# Altium PCB NUC977 DEV BOARD.PcbDoc (part 2 of 5)
Units mil, origin at the board's own origin, x right, y up, seen from the top; angles counter-clockwise.
Board outline 9012.5 x 7677.17 mil, 4 copper layers (Top, 2-GND, 3-POWER, Bottom), stack 35.4 mil thick; 487 components, 451 nets, 1969 pads, 1529 vias.
Unrouted connection lines stored in the file: 1.
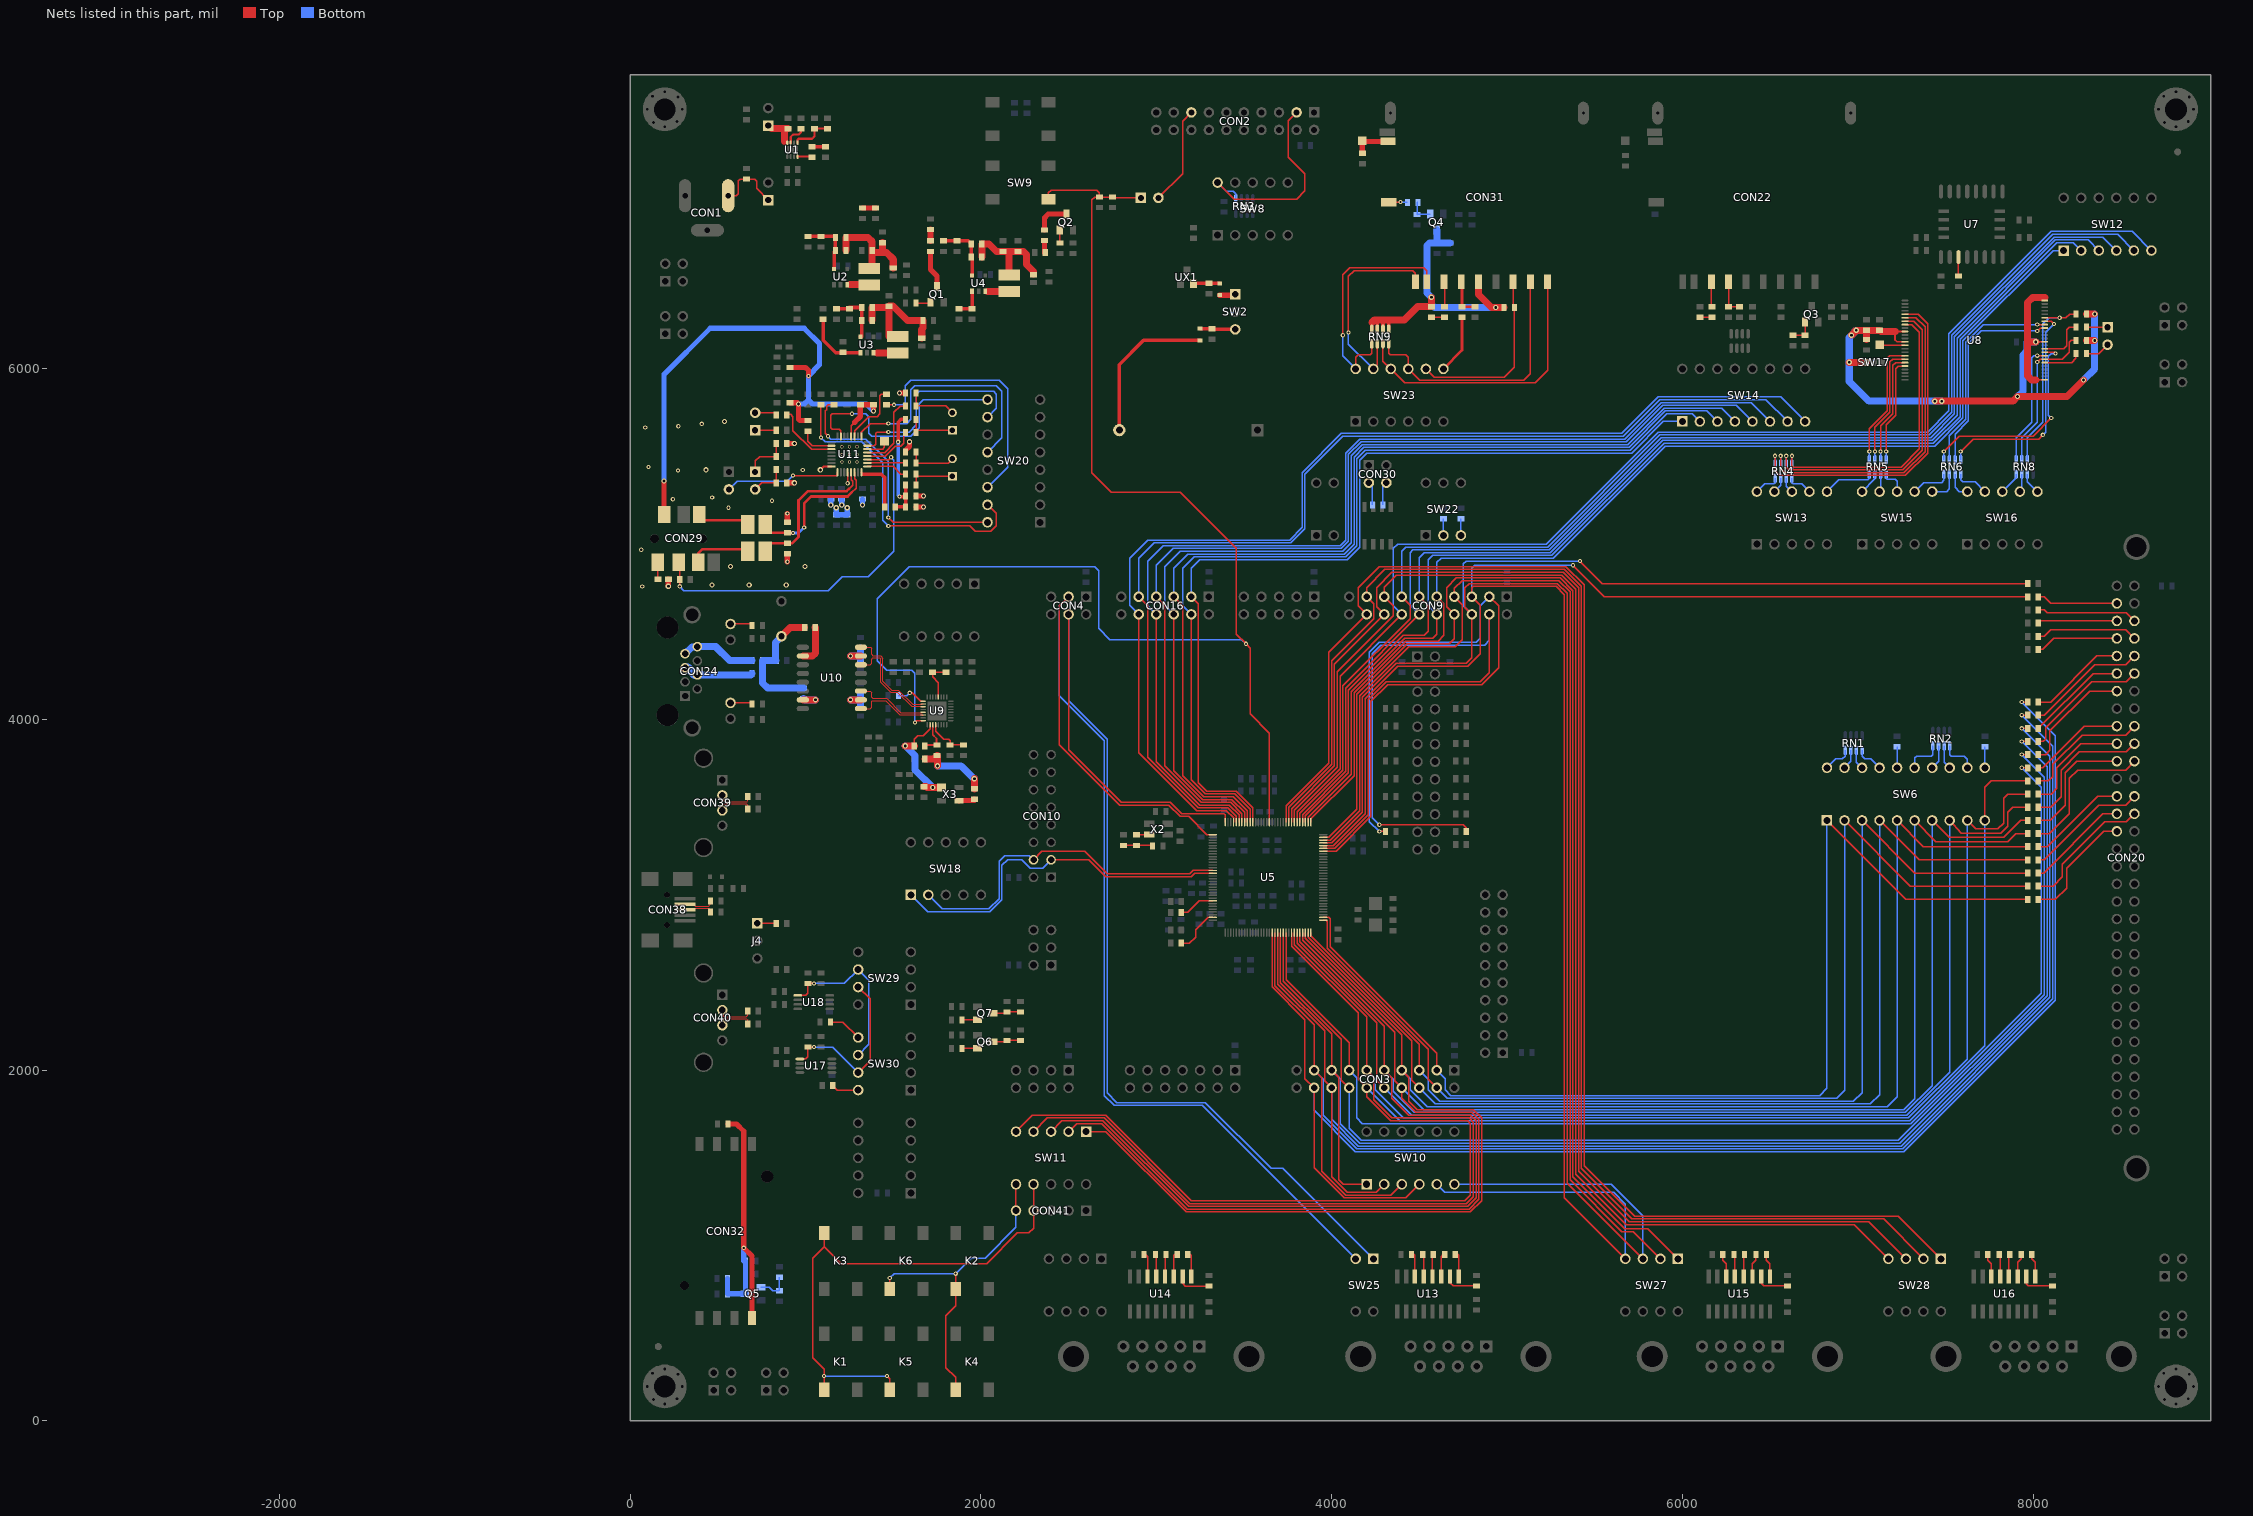
[diagram p4: the nets of this part, all layers, seen from the top]

## Via types
v1: diameter 24, hole 12, Top to Bottom, 897 vias
v2: diameter 30, hole 16, Top to Bottom, 628 vias
v3: diameter 20, hole 10, Top to Bottom, 4 vias

## Nets (pads, with @x,y where several pads share a name; then routed paths per layer and width w, separated by ;. In a path a pad name is that pad's centre, name@x,y a point inside that pad or via, vN(x,y) a via of type N, cw(c..) or ccw(c..) an arc to the next point about the centre after c; other vN are vias at no path point) (continued)
CDAVS: C28.1 CB30.1 CT72.1 CT73.1 CT77.1 L13.1 R75.2 R76.1 R77.1 R83.1 R92.1 R94.1 R125.2 R126.2 U11.24 U11.28 U11.33 U11.34 U11.35 U11.36 U11.37 U11.38 U11.39 U11.40 U11.41 | length 785.8
  Top w8: v1(1240,5348) 1240,5410.14 U11.28@1240.16,5410.14
  Top w12: v2(1084.4,5424) 1104,5443.6 U11.24@1147.64,5443.6
  Top w30: v2(217.5,4760) L13.1@217.5,4800 ; R77.1@892.5,5350 v2(936,5350) ; R76.1@892.5,5575 v2(936,5575) ; v1(896,4900) R125.2@896,4946 ; R126.2@896,5126 v1(896,5175) ; v2(1536,5862.5) R83.1@1570,5862.5 ; R75.2@1570,5525 1570,5536 1592,5558 v2(1592,5584) ; CT72.1@1630,5212.5 v2(1672,5212.5) ; CB30.1@1630,5275 v2(1672,5275)
  Bottom w30: v2(1143.75,5224) CT73.1@1143.75,5257.5 ; v2(1175,5208) R92.1@1175,5167.5 R94.1@1237.5,5167.5 v2(1237.5,5208) ; v2(1206.25,5224) C28.1@1206.25,5257.5 ; v2(1325,5224) CT77.1@1325,5257.5
  other v1: 68.64,4758.8 63.02,4968.26 560,5208 808,5248 242.96,5256.44 467.43,5265.97 272.01,5420 984,5424 104,5440 85.78,5666.01 274.31,5672.9 407.65,5686.7
  other v2: 465.95,4767.11 678.09,4767.11 890.22,4767.11 572.02,4873.18 996.28,4873.18 432,5424 537.5,5700
CDVS: CON29.G CT75.1 CT79.1 R84.1 R87.1 R89.1 U11.12 | length 3292.2
  Top w8: U11.12@1259.84,5614.86 1259.84,5675.34 1280.5,5696
  Top w30: v2(192,5360) 192,5169 CON29.G@192.91,5169 ; CT75.1@912.5,5807.5 952.5,5807.5 v2(960,5800) 960,5713 968,5705 R84.1@1012.5,5705 ; CT79.1@912.5,6007.5 913,6008 1000,6008 1016,5992 v1(1016,5960) ; 1280.5,5696 1312.5,5728 R89.1@1312.5,5795 R87.1@1387.5,5795 v2(1387.5,5760)
  Bottom w30: v2(192,5360) 192,5968.91 456,6232 992,6232 1080,6144 1080,6024 v1(1016,5960) 1016,5824 ; v2(960,5800) 992,5800 1016,5824 ; v2(1387.5,5760) 1347.5,5800 1040,5800 1016,5824
COL: R57.1 R58.2 U9.4 | length 242.3
  Top w8: U9.4@1741.63,3970.76 1741.63,3933.37 1787,3888 1816,3888 1824,3880 1824,3856 R57.1@1825,3855 R58.2@1900,3855
COL0: CON41.4 K1.1 K3.2 K5.1 SW11.7 | length 2962.1
  Top w8: K1.1@1105.32,177.66 v1(1105.32,256) 1105.32,294.68 1040,360 1040,928 1105.32,993.32 ; K3.2@1105.32,1072.34 1105.32,993.32 ; v1(1464,256) 1480,240 1480,177.97 K5.1@1480.32,177.66 ; SW11.7@2300,1350 CON41.4@2300,1200 2300,1100 2272,1072 2208,1072 2032,896 1202.63,896 1105.32,993.32
  Bottom w8: v1(1105.32,256) v1(1464,256)
COL1: CON41.5 K2.1 K4.1 K6.1 SW11.6 | length 1857.3
  Top w8: K6.1@1480.32,752.66 v1(1480.32,816) ; K4.1@1855.32,177.66 1856,178.34 1856,248 1800,304 1800,600.68 1855.32,656 K2.1@1855.32,752.66 1856,753.34 v1(1856,840) ; CON41.5@2200,1200 SW11.6@2200,1350
  Bottom w8: v1(1480.32,816) 1504.32,840 v1(1856,840) 1944,928 2024,928 2200,1104 CON41.5@2200,1200
CRS: R59.1 R60.2 U9.20 | length 230.2
  Top w8: U9.20@1757.37,4128.24 1757.37,4210.63 1725,4243 R59.1@1725,4270 R60.2@1800,4270
CSB: SW20.9 U11.15 | length 1341
  Top w8: U11.15@1200.79,5614.86 1200.79,5647.21 1192,5656 1152,5656 1144,5664 1144,5736 1152,5744 v1(1264,5744)
  Bottom w8: v1(1264,5744) 1344,5744 1360,5728 1360,5632 1376,5616 1600,5616 1648,5664 1648,5801 1672,5825 SW20.9@2037.5,5825
DAC0: C63.1 R126.1 U11.30 | length 843.9
  Top w8: 1264,5296.47 1288,5320.47 1288,5364 1279.53,5372.47 U11.30@1279.53,5410.14
  Top w15: C63.1@770,5112 770,5066 R126.1@896,5066 898,5064 v1(928,5064) ; v1(992,5096) 992,5232 1032,5272 1239.53,5272 1264,5296.47
  Bottom w15: v1(928,5064) 960,5064 v1(992,5096)
DAC1: C62.1 R125.1 U11.29 | length 880.5
  Top w8: 1248,5316.16 1267.84,5336 1267.84,5360.16 1259.84,5368.16 U11.29@1259.84,5410.14
  Top w15: C62.1@770,4960 770,5006 R125.1@896,5006 925,5006 960,5041 960,5250.16 1012.5,5302.66 1234.5,5302.66 1248,5316.16
DACI: SW20.12 U11.9 | length 1427.8
  Top w8: U11.9@1318.9,5614.86 1318.9,5638.9 1368,5688 v1(1472,5688)
  Bottom w8: v1(1472,5688) 1576,5688 1600,5712 1600,5880 1624,5904 2088,5904 2120,5872 2120,5607.5 SW20.12@2037.5,5525
EMCLK: R103.2 SW23.7 | length 339
  Top w15: SW23.7@4637.5,6000 4743.75,6106.25 R103.2@4743.75,6295
EMCMD: CON31.2 R101.1 SW23.8 | length 1038
  Top w8: SW23.8@4537.5,6000 4585.5,5952 4984,5952 5042.5,6010.5 R101.1@5042.5,6350 5034.74,6357.76 CON31.2@5034.74,6496.16
EMD0: CON31.7 RN9.2 SW23.12 | length 1353.4
  Top w8: v1(4064,6192) 4064,6536 4104,6576 4526.62,6576 4542.62,6560 CON31.7@4542.62,6496.16 ; SW23.12@4137.5,6000 4137.5,6065.5 4152,6080 4221,6080 4229,6088 RN9.2@4229,6143
  Bottom w8: v1(4064,6192) 4064,6073.5 SW23.12@4137.5,6000
EMD1: CON31.8 RN9.4 SW23.11 | length 1190.1
  Top w8: v1(4096,6208) 4096,6528 4128,6560 4464,6560 4477.66,6546.34 CON31.8@4477.66,6496.16 ; SW23.11@4237.5,6000 4261,6023.5 RN9.4@4261,6143
  Bottom w8: v1(4096,6208) 4096,6141.5 SW23.11@4237.5,6000
EMD2: CON31.9 RN9.6 SW23.10 | length 1622.9
  Top w8: RN9.6@4293,6143 4293,6044.5 SW23.10@4337.5,6000 4417.5,5920 5160,5920 5231.59,5991.59 CON31.9@5231.59,6496.16
EMD3: CON31.1 RN9.8 SW23.9 | length 1503.5
  Top w8: RN9.8@4325,6143 4325,6088 4333,6080 4424,6080 4437.5,6066.5 SW23.9@4437.5,6000 4501.5,5936 5096,5936 5133.17,5973.17 CON31.1@5133.17,6496.16
EMVD33: CON31.4 CT80.2 Q4.D R97.2 R101.2 R102.1 RN9.1 RN9.3 RN9.5 RN9.7 | length 1814.2
  Top w20: RN9.1@4229,6225 4229,6264 ; RN9.3@4261,6225 4261,6280 ; RN9.5@4293,6225 4293,6280 ; RN9.7@4325,6225 4325,6280
  Top w40: 4229,6264 4245,6280 4261,6280 4293,6280 4325,6280 4416,6280 4491,6355 R102.1@4568.75,6355 v2(4568.75,6408) ; CON31.4@4837.89,6496.16 4837.89,6424.61 4912.5,6350 v2(4936,6350) R101.2@4982.5,6350
  Bottom w40: Q4.D@4600,6792.22 CT80.2@4600,6717.5 ; R97.2@4675,6717.5 CT80.2@4600,6717.5 ; v2(4936,6350) 4586,6350 4568.75,6367.25 v2(4568.75,6408) 4544,6432.75 4544,6704 4557.5,6717.5 CT80.2@4600,6717.5
EMWP: CON31.11 PAD3.\ R124.1 | length 218
  Top w30: R124.1@4175,7230 PAD3.\@4175,7300 4177.66,7297.34 CON31.11@4321.95,7297.34
ETHX0: R65.1 R66.1 U9.3 | length 196.9
  Top w8: R65.1@1680,3850 1682,3850 R65.1@1687,3855 ; 1725.88,3912.5 U9.3@1725.88,3970.76 ; R66.1@1746.53,3856.34 1747.88,3855 R66.1@1750,3855
  Top w10: R65.1@1687,3855 R66.1@1747.88,3855 ; 1725.88,3912.5 1746.53,3891.84 R66.1@1746.53,3856.34
ETHX1: C23.1 R65.2 U9.2 X3.1 | length 633.4
  Top w8: R65.2@1620,3850 1620,3888 1639.81,3907.81 1670.31,3907.81 1710.13,3947.63 U9.2@1710.13,3970.76
  Top w40: v2(1568,3850) R65.2@1620,3850 ; C23.1@1674.5,3617 1687.5,3617 1692,3612.5 v2(1725,3612.5) X3.1@1775,3612.5
  Bottom w40: v2(1568,3850) 1569,3850 1625,3794 1625,3712.5 v2(1725,3612.5)
FS: SW20.10 U11.7 | length 1162.3
  Top w8: U11.7@1352.36,5561.71 1392,5561.71 1400,5569.71 1400,5632 1408,5640 v1(1472,5640)
  Bottom w8: v1(1472,5640) 1592,5640 1632,5680 1632,5856 1648,5872 2072,5872 2088,5856 2088,5775.5 SW20.10@2037.5,5725
ICENRST: CON2.15 J3.2 | length 565.2
  Top w8: J3.2@3012.5,6975 3150,7112.5 3150,7412.5 CON2.15@3200,7462.5
LAUXI: C33.2 U11.19 | length 385.9
  Top w8: C33.2@892.5,5737.5 896,5741 915,5741 928,5728 928,5648 1033.97,5542.03 U11.19@1147.64,5542.03
LCLK: CON20.8 RL19.2 | length 583.9
  Top w10: RL19.2@8030,4475 8064,4475 8101,4512 8528.75,4512 CON20.8@8578.15,4462.6
LCS: CON20.3 RL17.2 | length 463.6
  Top w8: RL17.2@8030,4700 8064,4700 8101.4,4662.6 CON20.3@8478.15,4662.6
LD0: CON20.29 RL1.2 | length 674.9
  Top w8: RL1.2@8030,2975 8128,2975 8192,3039 8192,3152 8402.6,3362.6 CON20.29@8478.15,3362.6
LD1: CON20.28 RL2.2 | length 761.2
  Top w8: RL2.2@8030,3050 8114,3050 8168,3104 8168,3176 8408,3416 8531.55,3416 CON20.28@8578.15,3462.6
LD2: CON20.27 RL3.2 | length 588
  Top w8: RL3.2@8030,3125 8061,3125 8398.6,3462.6 CON20.27@8478.15,3462.6
LD3: CON20.26 RL4.2 | length 698.3
  Top w8: RL4.2@8030,3200 8064,3200 8376,3512 8527.55,3512 CON20.26@8578.15,3562.6
LD4: CON20.25 RL5.2 | length 567.2
  Top w8: RL5.2@8030,3275 8080,3275 8368,3562.6 CON20.25@8478.15,3562.6
LD5: CON20.22 RL6.2 | length 836.2
  Top w8: RL6.2@8030,3350 8094,3350 8208,3464 8208,3664 8256,3712 8527.55,3712 CON20.22@8578.15,3762.6
LD6: CON20.21 RL7.2 | length 695.8
  Top w8: RL7.2@8030,3425 8097,3425 8184,3512 8184,3696 8250.6,3762.6 CON20.21@8478.15,3762.6
LD7: CON20.20 RL8.2 | length 787.4
  Top w8: RL8.2@8030,3500 8100,3500 8160,3560 8160,3712 8264,3816 8531.55,3816 CON20.20@8578.15,3862.6
LD8: CON20.19 RL9.2 | length 636.8
  Top w8: RL9.2@8030,3575 8103,3575 8136,3608 8136,3726.6 8272,3862.6 CON20.19@8478.15,3862.6
LD9: CON20.18 RL10.2 | length 718.6
  Top w8: RL10.2@8030,3650 8088,3650 8112,3674 8112,3744 8280,3912 8527.55,3912 CON20.18@8578.15,3962.6
LD10: CON20.17 RL11.2 | length 546.6
  Top w8: RL11.2@8030,3725 8056,3725 8293.6,3962.6 CON20.17@8478.15,3962.6
LD11: CON20.13 RL12.2 | length 664
  Top w8: RL12.2@8030,3800 8072,3800 8096,3824 8096,3936 8322.6,4162.6 CON20.13@8478.15,4162.6
LD12: CON20.12 RL13.2 | length 746.2
  Top w8: RL13.2@8030,3875 8059,3875 8072,3888 8072,3952 8336,4216 8531.55,4216 CON20.12@8578.15,4262.6
LD13: CON20.11 RL14.2 | length 577.6
  Top w8: RL14.2@8030,3950 8342.6,4262.6 CON20.11@8478.15,4262.6
LD14: CON20.10 RL15.2 | length 687.8
  Top w8: RL15.2@8030,4025 8064.75,4025 8352.75,4312.5 8528.05,4312.5 CON20.10@8578.15,4362.6
LD15: CON20.9 RL16.2 | length 556.9
  Top w8: RL16.2@8030,4100 8100,4100 8362.6,4362.6 CON20.9@8478.15,4362.6
LDEN: CON20.5 RL22.2 | length 460.8
  Top w8: RL22.2@8030,4550 8030,4562.6 CON20.5@8478.15,4562.6
LHSYNC: CON20.7 RL20.2 | length 474.1
  Top w8: RL20.2@8030,4400 8056,4400 8118.6,4462.6 CON20.7@8478.15,4462.6
LIN0: CON29.B R91.1 U11.3 | length 2148.3
  Top w8: CON29.B@275.59,4897.34 282.5,4890.43 R91.1@282.5,4800 v1(282.5,4760) ; U11.3@1352.36,5482.97 1475.35,5482.97 1488,5495.62 v1(1488,5496)
  Bottom w8: v1(282.5,4760) 306.5,4736 1130.5,4736 1209.34,4814.84 1358.84,4814.84 1504,4960 1504,5480 v1(1488,5496)
LIN1: PAD4.\ U11.6 | length 137.2
  Top w8: U11.6@1352.36,5542.03 1440,5542.03 1450,5552.03 PAD4.\@1450,5587.5
LSPKOUT: CON25.2 U11.25 | length 666.7
  Top w8: v1(928,5391.89) 1175.89,5391.89 1181.1,5397.1 U11.25@1181.1,5410.14
  Bottom w8: CON25.2@562.5,5312.5 610,5360 896.11,5360 v1(928,5391.89)
LVSYNC: CON20.6 RL21.2 | length 574
  Top w8: RL21.2@8030,4625 8064,4625 8081,4608 8532.75,4608 CON20.6@8578.15,4562.6
MCLK: R82.1 U11.11 | length 361.9
  Top w8: U11.11@1279.53,5614.86 1279.53,5647.53 1360,5728 1408,5728 1424,5744 1424,5847 1432,5855 R82.1@1462.5,5855
MDI_RN: U9.26 U10.8 | length 590.2
  Top w4: U10.8@1315.5,4412.5 1371.5,4412.5 1376,4408 1376,4371.51 1384,4363.51 1428.2,4363.51 1441.2,4350.51 1441.2,4217.46 1490.51,4168.15 1528.82,4168.15 1609.97,4087 1662.13,4087 1664,4088.87 U9.26@1670.76,4088.87
MDI_RP: U9.27 U10.6 | length 578.7
  Top w4: U10.6@1315.5,4312.5 1368.5,4312.5 1376,4320 1376,4344 1383.51,4351.51 1423.23,4351.51 1429.2,4345.54 1429.2,4212.48 1485.54,4156.15 1523.85,4156.15 1605,4075 1662.13,4075 1664,4073.12 U9.27@1670.76,4073.12
MDI_TN: U9.29 U10.3 | length 422.4
  Top w4: U10.3@1315.5,4162.5 1368,4162.5 1376,4154.5 1376,4128 1383.53,4120.47 1462.72,4120.47 1543.44,4039.75 1664,4039.75 1665.87,4041.63 U9.29@1670.76,4041.63
MDI_TP: U9.30 U10.1 | length 428.1
  Top w4: U10.1@1315.5,4062.5 1368,4062.5 1376,4070.5 1376,4104 1380.47,4108.47 1457.75,4108.47 1538.47,4027.75 1664,4027.75 1665.87,4025.88 U9.30@1670.76,4025.88
MIC00: C29.1 U11.2 | length 218
  Top w8: U11.2@1352.36,5463.29 1569.21,5463.29 C29.1@1570,5462.5
MIC01: C32.1 U11.1 | length 235.7
  Top w8: U11.1@1352.36,5443.6 1500.4,5443.6 1544,5400 C32.1@1570,5400
MIC10: C35.1 U11.5 | length 430.6
  Top w8: U11.5@1352.36,5522.34 1450.34,5522.34 1504,5576 1504,5752 1539.5,5787.5 C35.1@1570,5787.5
MIC11: C34.1 U11.4 | length 309.5
  Top w8: U11.4@1352.36,5502.66 1454.66,5502.66 1512,5560 1544,5560 1560,5576 1560,5637.5 C34.1@1570,5637.5
MICBIAS: CB30.2 CT72.2 R74.2 R78.2 R79.2 | length 694.9
  Top w20: R74.2@1511.25,5212.5 CT72.2@1570,5212.5 CB30.2@1570,5269.67 ; v1(1528,5584) 1528,5696 1544.5,5712.5 R79.2@1570,5712.5 ; v1(1536,5272) 1567.67,5272 CB30.2@1570,5269.67 ; R78.2@1570,5337.5 CB30.2@1570,5275 CB30.2@1570,5269.67
  Bottom w20: v1(1528,5584) 1528,5280 v1(1536,5272)
MODE: R84.2 U11.18 | length 203.3
  Top w8: R84.2@1012.5,5645 1012.5,5587.5 1038.29,5561.71 U11.18@1147.64,5561.71
N02492: C50.1 U14.5 | length 127.1
  Top w8: C50.1@2995,950 3000,945 U14.5@3000,825
N02496: C49.1 U14.3 | length 143.1
  Top w8: U14.3@3100,825 3100,944 3108,952 3118,952 C49.1@3120,950
N02500: C49.2 U14.1 | length 143.1
  Top w8: C49.2@3180,950 3182,952 3192,952 3200,944 U14.1@3200,825
N02504: C50.2 U14.4 | length 127.1
  Top w8: U14.4@3050,825 3050,945 C50.2@3055,950
N02534: C47.1 U14.2 | length 198.5
  Top w8: U14.2@3150,825 3150,784 3166,768 3298,768 C47.1@3300,770
N02546: C51.2 U14.6 | length 136.8
  Top w8: C51.2@2930,950 2936,950 2950,936 U14.6@2950,825
N02580: C55.1 U15.5 | length 130
  Top w8: C55.1@6295,950 6300,950 U15.5@6300,825
N02584: C54.1 U15.3 | length 133.3
  Top w8: U15.3@6400,825 6400,896 6420,916 C54.1@6420,950
N02588: C54.2 U15.1 | length 133.3
  Top w8: C54.2@6480,950 6480,916 6500,896 U15.1@6500,825
N02592: C55.2 U15.4 | length 130
  Top w8: U15.4@6350,825 6350,950 C55.2@6355,950
N02616: C52.1 U15.2 | length 196.8
  Top w8: U15.2@6450,825 6450,784 6464,770 C52.1@6600,770
N02708: C56.2 U15.6 | length 133.3
  Top w8: C56.2@6230,950 6230,916 6250,896 U15.6@6250,825
N03132: C60.1 U16.5 | length 130
  Top w8: C60.1@7807.5,950 7812.5,950 U16.5@7812.5,825
N03136: C59.1 U16.3 | length 133.3
  Top w8: U16.3@7912.5,825 7912.5,904 7932.5,924 C59.1@7932.5,950
N03140: C59.2 U16.1 | length 133.3
  Top w8: C59.2@7992.5,950 7992.5,924 8012.5,904 U16.1@8012.5,825
N03144: C60.2 U16.4 | length 127.1
  Top w8: U16.4@7862.5,825 7862.5,945 C60.2@7867.5,950
N03174: C57.1 U16.2 | length 198.3
  Top w8: U16.2@7962.5,825 7962.5,781.5 7974,770 C57.1@8112.5,770
N03186: C61.2 U16.6 | length 133.3
  Top w8: C61.2@7742.5,950 7742.5,916 7762.5,896 U16.6@7762.5,825
N03932: C45.1 U13.5 | length 130
  Top w8: C45.1@4520,950 4525,950 U13.5@4525,825
N03936: C44.1 U13.3 | length 137.4
  Top w8: U13.3@4625,825 4625,937 4638,950 C44.1@4645,950
N03940: C44.2 U13.1 | length 141.5
  Top w8: C44.2@4705,950 4719,950 4725,944 U13.1@4725,825
N03944: C45.2 U13.4 | length 127.1
  Top w8: U13.4@4575,825 4575,945 C45.2@4580,950
N03976: C42.1 U13.2 | length 193.9
  Top w8: U13.2@4675,825 4675,789 4694,770 C42.1@4825,770
N03988: C46.2 U13.6 | length 141.5
  Top w8: C46.2@4455,950 4469,950 4475,944 U13.6@4475,825
N16062858: R130.1 SW29.6 SW30.6 U18.5 | length 975.8
  Top w8: U18.5@955.26,2426.77 1000,2426.77 1012.5,2439.27 R130.1@1012.5,2495 v1(1048,2495)
  Bottom w8: v1(1048,2495) 1220.5,2495 SW29.6@1300,2574.5 1360,2514.5 1360,2147 SW30.6@1300,2087
N16062862: R129.1 SW29.7 SW30.7 U17.5 | length 997.2
  Top w8: U17.5@967.76,2064.27 1000,2064.27 1012.5,2076.77 R129.1@1012.5,2132.5 v1(1048,2132.5) ; SW30.7@1300,1987 1368,2055 1368,2406.5 SW29.7@1300,2474.5
  Bottom w8: v1(1048,2132.5) 1154.5,2132.5 SW30.7@1300,1987
N16063306: LED9.1 Q6.E | length 87.3
  Top w8: LED9.1@1892.5,2125 1892.6,2125.1 Q6.E@1979.72,2125.1
N16063352: LED7.1 Q6.C R115.1 | length 162.2
  Top w8: Q6.C@2070.28,2162.5 2150,2162.5 LED7.1@2150,2170 R115.1@2225,2170
N16063546: LED10.1 Q7.E | length 87.3
  Top w8: LED10.1@1892.5,2287.5 1892.5,2287.6 Q7.E@1979.72,2287.6
N16063582: LED8.1 Q7.C R117.1 | length 157.8
  Top w8: Q7.C@2070.28,2325 2142.5,2325 LED8.1@2150,2332.5 R117.1@2225,2332.5
N16063690: R112.2 SW30.8 | length 155.6
  Top w8: R112.2@1155,1912.5 1180.5,1887 SW30.8@1300,1887
N16063694: R114.2 SW30.5 | length 194
  Top w8: R114.2@1142.5,2275 1212,2275 SW30.5@1300,2187
N16071573: CB1.1 J2.1 U1.8 | length 212
  Top w8: 880,7296 886.63,7289.37 U1.8@895.47,7289.37
  Top w40: J2.1@787.5,7387.5 805,7370 CB1.1@880,7370 ; 880,7296 CB1.1@880,7370 ; CB1.1@900,7370 CB1.1@880,7370
N16071783: R14.1 X2.3 | length 73.7
  Top w8: R14.1@2887.5,3342.5 2889.49,3344.49 X2.3@2960.33,3344.49
N16071803: C5.1 R13.2 R14.2 | length 166.5
  Top w8: C5.1@2812.5,3282.5 R14.2@2887.5,3282.5 2975.5,3282.5 R13.2@2978,3280
N16071977: C1.1 CON1.1 J1.1 | length 384.8
  Top w8: CON1.1@558.56,6987.5 603.5,6987.5 616,7000 616,7072 626.5,7082.5 C1.1@662.5,7082.5 709.5,7082.5 721,7071 721,7029 J1.1@787.5,6962.5
N16072061: LED1.2 U1.4 | length 84.3
  Top w12: U1.4@954.53,7210.63 1034.37,7210.63 LED1.2@1037.5,7207.5
N16072077: R1.2 U1.7 | length 124.2
  Top w12: U1.7@915.16,7289.37 915.16,7323.16 928,7336 960,7336 975,7351 R1.2@975,7370
N16072151: R3.2 R5.1 U1.5 | length 240.3
  Top w12: U1.5@954.53,7289.37 954.53,7306.53 960.5,7312.5 1037.5,7312.5 1050,7325 R3.2@1050,7370 R5.1@1125,7370
N16073800: R25.1 U5.127 | length 264.2
  Top w8: R25.1@3142.5,2725 3189,2725 3224,2760 3224,2800 3295.65,2871.65 U5.127@3322.54,2871.65
N16073966: R24.1 U5.121 | length 207.4
  Top w8: R24.1@3142.5,2900 3180,2900 3246.14,2966.14 U5.121@3322.54,2966.14
N16075968: C6.2 CT7.1 CT8.1 L1.2 R15.2 SW1.1 | length 646.2
  Top w40: R15.2@1230,6675 C6.2@1230,6750 1355,6750 1380,6725 CT7.1@1380,6675 CT7.1@1380,6663.84 ; L1.2@1362.5,6572.24 1365.26,6575 1380,6575 CT7.1@1380,6663.84 ; CT8.1@1437.5,6720 1437.5,6663.84 ; SW1.1@1500,6575 1500,6625 1461.16,6663.84 1437.5,6663.84 ; CT7.1@1380,6663.84 1437.5,6663.84
N16075996: C9.2 C11.1 R18.1 R19.2 U3.5 | length 327.4
  Top w20: C11.1@1175,6342.5 R19.2@1250,6342.5 1250,6350 C9.2@1320,6350 R18.1@1320,6275 1320,6182.53 U3.5@1312.6,6182.53
N16076048: C6.1 C8.2 R15.1 R16.2 U2.5 | length 342.6
  Top w20: R16.2@1012.5,6755 C8.2@1087.5,6755 1165,6755 C6.1@1170,6750 R15.1@1170,6675 1162.6,6667.6 U2.5@1162.6,6570.03
N16076130: L1.1 U2.3 | length 126
  Top w8: U2.3@1237.4,6479.97 1254,6479.97
  Top w40: 1254,6479.97 1360.29,6479.97 L1.1@1362.5,6477.76
N16076160: C9.1 CT10.1 CT12.1 L2.2 R18.2 SW3.1 | length 725
  Top w40: R18.2@1380,6275 C9.1@1380,6350 CT10.1@1475,6350 ; L2.2@1525,6184.74 1475,6184.74 CT10.1@1475,6350 ; SW3.1@1662.5,6175 1662.5,6224.5 1670,6232 CT12.1@1670,6275 1581,6275 1498.5,6357.5 CT10.1@1475,6357.5 CT10.1@1475,6350
N16076656: BT1.2 D2.1 | length 891.7
  Top w20: BT1.2@2789.3,5650.5 2789.3,6024.3 2927.5,6162.5 D2.1@3250,6162.5
N16076674: C14.2 C15.1 R22.1 R23.2 U4.5 | length 346.8
  Top w20: C15.1@1787.5,6730 R23.2@1862.5,6730 1927.5,6730 C14.2@1945,6712.5 R22.1@1945,6637.5 1950.1,6632.4 U4.5@1950.1,6532.53
N16076678: C13.1 R21.2 U4.1 | length 175
  Top w20: R21.2@1875,6342.5 C13.1@1950,6342.5 1950.1,6342.6 U4.1@1950.1,6442.47
N16076738: C14.1 CT14.1 CT16.1 L3.2 R22.2 SW4.1 | length 622.4
  Top w30: SW4.1@2300,6537.5 2300,6556
  Top w40: R22.2@2005,6637.5 C14.1@2005,6712.5 2045.5,6712.5 2088,6670 CT14.1@2125,6670 2160,6670 ; L3.2@2162.5,6534.74 2160,6537.24 2160,6670 ; 2300,6556 2260,6596 2260,6652 2242,6670 CT16.1@2212.5,6670 2160,6670
N16076802: CB2.1 D2.2 SW2.3 | length 204.5
  Top w20: D2.2@3250,6229.5 CB2.1@3317,6229.5 3317,6225 SW2.3@3450,6225
N16077186: C10.1 R17.1 U3.1 | length 373.5
  Top w20: R17.1@1100,6282.5 1100,6164 1171.53,6092.47 C10.1@1225.03,6092.47 ; C10.1@1212.5,6095 C10.1@1225.03,6092.47 ; U3.1@1312.6,6092.47 C10.1@1225.03,6092.47
N16077540: L2.1 U3.3 | length 138.5
  Top w8: U3.3@1387.4,6092.47 1406,6092.47 1408.21,6090.26
  Top w40: 1408.21,6090.26 L2.1@1525,6090.26
N16077552: L3.1 U4.3 | length 138.5
  Top w8: U4.3@2024.9,6442.47 2038,6442.47
  Top w40: 2038,6442.47 2040.21,6440.26 L3.1@2162.5,6440.26
N16088274: Q3.G R43.1 R44.2 | length 143.6
  Top w8: R43.1@6631.25,6192.5 R44.2@6700,6192.5 6700,6267.22 Q3.G@6700.1,6267.22
N16088560: RN5.1 SW13.6 | length 297
  Bottom w8: SW13.6@6825,5300 6893,5368 7058.5,5368 7066.5,5376 RN5.1@7066.5,5400
N16088582: RN6.3 SW15.6 | length 189.4
  Bottom w8: SW15.6@7425,5300 7508,5300 7523.5,5315.5 RN6.3@7523.5,5400
N16088594: RN6.1 SW15.7 | length 229.3
  Bottom w8: SW15.7@7325,5300 7377,5352 7480,5352 7491.5,5363.5 RN6.1@7491.5,5400
N16088636: RN8.1 SW16.8 | length 132.7
  Bottom w8: SW16.8@7825,5300 7904,5379 RN8.1@7904,5400
N16089230: RN4.1 SW13.10 | length 148.5
  Bottom w8: SW13.10@6425,5300 6469,5344 6521,5344 6529,5352 RN4.1@6529,5375
N16089234: RN4.3 SW13.9 | length 89.9
  Bottom w8: SW13.9@6525,5300 6561,5336 RN4.3@6561,5375
N16089238: RN4.5 SW13.8 | length 88.3
  Bottom w8: RN4.5@6593,5375 6593,5332 SW13.8@6625,5300
N16089246: RN4.7 SW13.7 | length 144.5
  Bottom w8: RN4.7@6625,5375 6625,5352 6633,5344 6681,5344 SW13.7@6725,5300
N16089266: C17.1 CON22.5 R52.1 | length 203.7
  Top w8: R52.1@6262.5,6355 R52.1@6264.47,6355 ; CON22.5@6264.47,6496.16 R52.1@6264.47,6355 ; C17.1@6325,6355 R52.1@6264.47,6355
N16089318: RN5.3 SW15.10 | length 130.4
  Bottom w8: SW15.10@7025,5300 7098.5,5373.5 RN5.3@7098.5,5400
N16089326: RN5.5 SW15.9 | length 102.3
  Bottom w8: SW15.9@7125,5300 7130.5,5305.5 RN5.5@7130.5,5400
N16089330: RN5.7 SW15.8 | length 152.5
  Bottom w8: RN5.7@7162.5,5400 7162.5,5376 7168,5370.5 7213.5,5370.5 7225,5359 SW15.8@7225,5300
N16089414: RN6.5 SW16.10 | length 155.1
  Bottom w8: RN6.5@7555.5,5400 7555.5,5324.5 7580,5300 SW16.10@7625,5300
N16089418: RN6.7 SW16.9 | length 197.7
  Bottom w8: RN6.7@7587.5,5400 7587.5,5368 7600,5355.5 7669.5,5355.5 SW16.9@7725,5300
N16089662: RN8.3 SW16.7 | length 104.6
  Bottom w8: SW16.7@7925,5300 7936,5311 RN8.3@7936,5400
N16089708: CON22.6 LED5.2 | length 142.3
  Top w8: CON22.6@6166.04,6496.16 6166.04,6357.71 LED5.2@6168.75,6355
N16089718: RN8.5 SW16.6 | length 123.6
  Bottom w8: RN8.5@7968,5400 7968,5357 SW16.6@8025,5300
N16090054: CON23.1 R47.1 | length 120
  Top w8: R47.1@8305,6237.5 CON23.1@8425,6237.5
N16090066: CON23.2 R48.1 | length 140.7
  Top w8: R48.1@8305,6087.5 8375,6087.5 CON23.2@8425,6137.5
N16091004: LED5.1 R51.2 | length 68.8
  Top w8: R51.2@6100,6295 LED5.1@6168.75,6295
N16113780: R41.2 U7.3 | length 107.5
  Top w8: R41.2@7575,6530 U7.3@7575,6637.5
N16116600: CON39.2 R134.1 | length 202.3
  Top w5: CON39.2@525,3568.31 525,3543.5 536,3532.5 666.5,3532.5 670,3536 R134.1@670,3562.5
N16116644: CON39.3 R135.1 | length 202.4
  Top w5: CON39.3@525,3481.69 525,3509.5 536,3520.5 661.5,3520.5 670,3512 R135.1@670,3490.5
N16117426: CON40.2 R132.1 | length 203
  Top w5: CON40.2@525,2343.31 525,2317 536,2306 662.5,2306 669,2312.5 669,2336.5 R132.1@670,2337.5
N16117430: CON40.3 R133.1 | length 203
  Top w5: CON40.3@525,2256.69 525,2283 536,2294 662.5,2294 669,2287.5 669,2263.5 R133.1@670,2262.5
N16118016: CON38.2 R127.1 | length 172.7
  Top w5: CON38.2@312.2,2946.3 360,2946.3 369.75,2936.55 448,2936.55 457.5,2946.05 R127.1@457.5,2965.5
N16118208: CON38.3 R128.1 | length 166.8
  Top w5: CON38.3@312.2,2914.8 360,2914.8 369.75,2924.55 448,2924.55 457.5,2915.05 R128.1@457.5,2901.5
N16118543: J4.1 R131.1 | length 107.5
  Top w8: J4.1@725,2837.5 R131.1@832.5,2837.5
N16139982: PAD1.\ U8.38 | length 146.2
  Top w8: PAD1.\@7125,6137.5 7128.15,6134.35 U8.38@7269.88,6134.35
N16143119: CX1.1 D1.1 UX1.2 | length 150.3
  Top w20: UX1.2@3213,6487.5 3214,6488.5 CX1.1@3300.5,6488.5 3361.5,6488.5 D1.1@3362.5,6487.5
N16151191: D1.2 SW2.1 | length 92.5
  Top w30: D1.2@3362.5,6420.5 3367,6420 3450,6420 SW2.1@3450,6425
N16774332: C34.2 M2.1 R79.1 | length 282.5
  Top w8: C34.2@1630,5637.5 C34.2@1630,5650 ; R79.1@1630,5712.5 C34.2@1630,5650 ; M2.1@1837.5,5650 C34.2@1630,5650
N16774348: C35.2 M2.2 R83.2 | length 299.3
  Top w8: R83.2@1630,5862.5 C35.2@1630,5787.5 1631.5,5789 1798.5,5789 M2.2@1837.5,5750
N16774352: C29.2 M1.2 R75.1 | length 280.4
  Top w8: R75.1@1630,5525 C29.2@1630,5462.5 1812.5,5462.5 M1.2@1837.5,5487.5
N16774372: C63.2 CON29.D | length 368.2
  Top w15: CON29.D@393.7,5169 375,5150.29 375,5137.5 664,5137.5 670,5143.5 C63.2@670,5112
N16774666: CON29.A L13.2 | length 97.3
  Top w8: L13.2@157.5,4800 CON29.A@157.48,4897.34
N16774778: C62.2 CON29.C | length 353.8
  Top w15: CON29.C@387.8,4897.34 387.8,4946.8 412.8,4971.8 670,4971.8 C62.2@670,4960
N16775704: C30.1 CON27.1 | length 120
  Top w8: CON27.1@712.5,5650 C30.1@832.5,5650
N16775904: R74.1 U11.32 | length 314
  Top w10: U11.32@1318.9,5410.14 1318.9,5408 1326.9,5400
  Top w20: 1326.9,5400 1432,5400 1451.25,5380.75 R74.1@1451.25,5212.5
N16776180: C32.2 M1.1 R78.1 | length 270
  Top w8: R78.1@1630,5337.5 C32.2@1630,5387.5 ; C32.2@1630,5400 C32.2@1630,5387.5 ; M1.1@1837.5,5387.5 C32.2@1630,5387.5
N16776188: CB33.2 CON32.1 CT81.2 Q5.D R104.1 R105.1 R106.1 | length 1652.7
  Top w30: R106.1@558,1693.5 606,1693.5 647.5,1652 v1(647.5,987.5) 695,940 CON32.1@695,586.59
  Bottom w30: R105.1@555,812.5 R104.1@555,725 Q5.D@654.72,725 657.5,727.78 CT81.2@657.5,837.5 CB33.2@657.5,912.5 647.5,912.5 v1(647.5,987.5)
N16776342: CB34.2 Q5.G R107.2 | length 190.5
  Bottom w8: Q5.G@745.28,762.4 792.5,762.4 812.4,742.5 CB34.2@850,742.5 R107.2@850,820
N16776648: C27.1 CON26.1 R76.2 | length 267.9
  Top w8: CON26.1@712.5,5412.5 712.5,5475 737.5,5500 C27.1@832.5,5500 R76.2@832.5,5575
N16776656: C31.1 CON26.2 R77.2 | length 210.5
  Top w8: CON26.2@712.5,5312.5 750,5350 R77.2@832.5,5350 C31.1@832.5,5425
N16776660: C33.1 CON27.2 | length 132.5
  Top w8: CON27.2@712.5,5750 832.5,5750 C33.1@832.5,5737.5
N16777927: R72.2 U10.10 | length 225
  Top w40: U10.10@984.5,4362.5 1040,4362.5 1056,4378.5 1056,4524 R72.2@1055,4525
N16777929: C25.1 C26.1 R68.1 R70.1 R72.1 R73.1 | length 755.7
  Top w40: C26.1@862.5,4475 912.5,4525 R72.1@995,4525
  Bottom w40: C25.1@832.5,4337.5 C25.1@827.5,4337.5 ; C26.1@862.5,4475 827.5,4440 C25.1@827.5,4337.5 ; R73.1@987.5,4180 784,4180 755,4209 R70.1@755,4262.5 R68.1@755,4337.5 C25.1@827.5,4337.5
N16777958: R73.2 U10.15 | length 143.1
  Top w40: U10.15@984.5,4112.5 v2(1056,4112.5)
  Bottom w40: R73.2@987.5,4120 995,4112.5 v2(1056,4112.5)
N16777963: CON24.7 CON24.8 R68.2 | length 432.7
  Bottom w40: CON24.7@312.5,4375.39 352,4414.89 381.92,4414.89 CON24.8@382.58,4415.55 488,4415.55 567.55,4336 693.5,4336 R68.2@695,4337.5
N16777971: CON24.4 CON24.5 R70.2 | length 402.3
  Bottom w40: CON24.4@382.58,4254.92 687.42,4254.92 R70.2@695,4262.5
  Bottom w49: CON24.5@312.5,4295.08 328,4295.08 367.08,4256 381.5,4256 CON24.4@382.58,4254.92
N16778019: RN1.3 SW6.19 | length 114.9
  Bottom w8: SW6.19@6925,3725 6961,3761 RN1.3@6961,3825
N16778021: RN1.5 SW6.18 | length 113.3
  Bottom w8: RN1.5@6993,3825 6993,3757 SW6.18@7025,3725
N16778023: RN1.7 SW6.17 | length 160.8
  Bottom w8: RN1.7@7025,3825 7025,3792 7041,3776 7074,3776 SW6.17@7125,3725
N16778025: RN1.1 SW6.20 | length 164.8
  Bottom w8: SW6.20@6825,3725 6876,3776 6913,3776 6929,3792 RN1.1@6929,3825
N16778027: R26.1 SW6.16 | length 120
  Bottom w8: SW6.16@7225,3725 R26.1@7225,3845
N16778037: R27.1 SW6.11 | length 120
  Bottom w8: SW6.11@7725,3725 R27.1@7725,3845
N16778059: CON24.10 R63.2 | length 126.2
  Top w8: CON24.10@571.95,4095.08 687.42,4095.08 R63.2@695,4087.5
N16778075: CON24.12 R64.2 | length 137.7
  Top w8: CON24.12@571.95,4545.08 700,4545.08 700,4542.5 R64.2@695,4537.5
N16778534: C19.1 C20.1 U10.2 | length 181
  Top w40: v2(1256,4112.5) U10.2@1315.5,4112.5
  Bottom w40: v2(1256,4112.5) 1312.5,4112.5 ; C20.1@1312.5,4080 1312.5,4112.5 ; C19.1@1312.5,4145 1312.5,4112.5
N16778621: C21.1 C22.1 U10.7 | length 181
  Top w40: v2(1256,4362.5) U10.7@1315.5,4362.5
  Bottom w40: v2(1256,4362.5) 1312.5,4362.5 ; C22.1@1312.5,4342.5 1312.5,4362.5 ; C21.1@1312.5,4407.5 1312.5,4362.5
N16778730: LED3.1 R6.1 | length 65
  Top w35: LED3.1@1712.5,6730 R6.1@1712.5,6795
N16778750: Q1.B R10.1 | length 86.7
  Top w8: R10.1@1630,6375 1711.6,6375 1712.6,6376 Q1.B@1712.6,6379.72
N16778858: C24.1 R66.2 R67.2 | length 437.7
  Top w40: C24.1@1680,3775 1730,3775 R66.2@1750,3795 1752,3795 v2(1752,3736) ; R67.2@1962.5,3605 v2(1962.5,3662.5)
  Bottom w40: v2(1752,3736) 1887.5,3736 1961,3662.5 v2(1962.5,3662.5)
N16778888: R67.1 X3.3 | length 92.5
  Top w30: X3.3@1875,3537.7 1962.5,3540 R67.1@1962.5,3545
N16778996: LED4.1 R7.1 | length 75
  Top w30: LED4.1@2362.5,6732.5 2362.5,6662.5 R7.1@2367.5,6662.5
N16778997: R53.2 U9.25 | length 169
  Top w8: v1(1593.84,4152.44) 1608.17,4152.44 1656,4104.62 U9.25@1670.76,4104.62
  Bottom w8: R53.2@1529.5,4137 1529.5,4136 1577.56,4136 1593.84,4152.29 v1(1593.84,4152.44)
N16779018: Q2.B R11.1 | length 74.8
  Top w8: R11.1@2450,6717.5 2450.1,6717.6 Q2.B@2450.1,6792.22
N16781870: C41.1 CON31.5 R103.1 | length 220.4
  Top w15: CON31.5@4739.47,6496.16 4743.75,6496.16 R103.1@4743.75,6355 C41.1@4818.75,6355
N16781872: CON31.6 LED6.2 | length 142.3
  Top w8: CON31.6@4641.04,6496.16 4643.75,6493.45 LED6.2@4643.75,6355
N16781874: Q4.G R98.1 R99.2 | length 151.2
  Bottom w8: R99.2@4492.5,6950 4487.5,6950 R98.1@4487.5,6880 4490.28,6882.78 Q4.G@4562.6,6882.78
N16782008: CON31.10 R99.1 | length 107
  Top w8: CON31.10@4325.89,6950.89 v1(4392,6950.89)
  Bottom w8: v1(4392,6950.89) 4431.61,6950.89 R99.1@4432.5,6950
N16782012: LED6.1 R102.2 | length 75
  Top w8: R102.2@4568.75,6295 LED6.1@4643.75,6295
N16801447: RN2.1 SW6.15 | length 217.9
  Bottom w8: SW6.15@7325,3725 7325,3781 7336,3792 7421,3792 7429,3800 RN2.1@7429,3850
N16801490: RN2.3 SW6.14 | length 139.9
  Bottom w8: SW6.14@7425,3725 7461,3761 RN2.3@7461,3850
N16801533: RN2.5 SW6.13 | length 138.3
  Bottom w8: RN2.5@7493,3850 7493,3757 SW6.13@7525,3725
N16801683: RN2.7 SW6.12 | length 210.4
  Bottom w8: RN2.7@7525,3850 7525,3800 7533,3792 7608,3792 7625,3775 SW6.12@7625,3725
N16808578: CON30.3 R100.1 | length 133.3
  Bottom w8: CON30.3@4212.5,5350 4232.5,5330 R100.1@4232.5,5225
N16808582: CON30.4 R100.2 | length 133.3
  Bottom w8: R100.2@4292.5,5225 4292.5,5330 CON30.4@4312.5,5350
N16817128: R96.2 SW22.3 | length 95
  Bottom w8: SW22.3@4737.5,5050 R96.2@4737.5,5145
N16817163: R95.2 SW22.2 | length 95
  Bottom w8: SW22.2@4637.5,5050 R95.2@4637.5,5145
N16819496: R80.2 SW20.16 | length 1527.1
  Top w8: v1(1128,5616) 1112,5632 1112,5760 1120,5768 1120,5787 1128,5795 R80.2@1162.5,5795 ; v1(1472,5152) 1499,5125 SW20.16@2037.5,5125
  Bottom w8: v1(1128,5616) 1144,5600 1344,5600 1472,5472 v1(1472,5152)
N16819524: R81.2 SW20.15 | length 1753.5
  Top w8: v1(1087.5,5608) R81.2@1087.5,5795 ; v1(1472,5104) 1937.5,5104 1968,5073.5 2056,5073.5 2086.5,5104 2086.5,5176 SW20.15@2037.5,5225
  Bottom w8: v1(1087.5,5608) 1111.5,5584 1320,5584 1440,5464 1440,5136 v1(1472,5104)
N16819552: R82.2 SW20.14 | length 1434.4
  Top w8: R82.2@1462.5,5795 v1(1504,5795)
  Bottom w8: v1(1504,5795) 1555,5795 1568,5808 1568,5904 1600,5936 2104,5936 2152,5888 2152,5439.5 SW20.14@2037.5,5325
N160722810: LED1.1 R4.1 | length 75
  Top w20: LED1.1@1037.5,7267.5 R4.1@1112.5,7267.5
N167787022: LED3.2 Q1.C | length 215.3
  Top w30: LED3.2@1712.5,6670 1712.5,6567.5 1750,6530 Q1.C@1750,6470.28
N167790142: LED4.2 Q2.C | length 202.7
  Top w30: LED4.2@2362.5,6792.5 2362.5,6861.28 2384,6882.78 Q2.C@2487.5,6882.78
N167791390: LED2.1 R8.1 | length 75
  Top w30: LED2.1@1325,6917.5 R8.1@1400,6917.5
N_ALE: RN6.4 U8.17 | length 1201.1
  Top w8: v1(8024,6252.46) U8.17@8067.13,6252.46
  Bottom w8: RN6.4@7523.5,5482 7523.5,5619.5 7616,5712 7616,6152 7716.46,6252.46 v1(8024,6252.46)
N_CLE: RN6.6 U8.16 | length 1165.6
  Top w8: v1(8024,6216.78) 8040,6232.78 U8.16@8067.13,6232.78
  Bottom w8: RN6.6@7555.5,5482 7555.5,5627.5 7632,5704 7632,6144 7704.78,6216.78 v1(8024,6216.78)
N_CS0: RN6.2 U8.9 | length 1207
  Top w8: v1(7491.5,5528) 7579.5,5616 8000,5616 v1(8104,5720) ; U8.9@8067.13,6094.98 8120,6094.98 v1(8128,6086.98)
  Bottom w8: RN6.2@7491.5,5482 v1(7491.5,5528) ; v1(8104,5720) 8088,5736 8088,6072 8102.98,6086.98 v1(8128,6086.98)
N_CS1: R47.2 U8.10 | length 283.4
  Top w8: U8.10@8067.13,6114.67 8176,6114.67 8192,6130.67 8192,6224 8205.5,6237.5 R47.2@8245,6237.5
N_D0: RN4.2 U8.29 | length 1958.7
  Top w8: v1(6529,5504) 6529,5415 6552,5392 7272,5392 7400,5520 7400,6256 7344.48,6311.52 U8.29@7269.88,6311.52
  Bottom w8: RN4.2@6529,5457 v1(6529,5504)
N_D1: RN4.4 U8.30 | length 1849.8
  Top w8: v1(6561,5504) 6561,5431 6584,5408 7264,5408 7384,5528 7384,6240 7332.17,6291.83 U8.30@7269.88,6291.83
  Bottom w8: RN4.4@6561,5457 v1(6561,5504)
N_D2: RN4.6 U8.31 | length 1745.7
  Top w8: v1(6593,5504) 6593,5439 6608,5424 7256,5424 7368,5536 7368,6224 7319.85,6272.15 U8.31@7269.88,6272.15
  Bottom w8: RN4.6@6593,5457 v1(6593,5504)
N_D3: RN4.8 U8.32 | length 1641.5
  Top w8: v1(6625,5504) 6625,5447 6632,5440 7248,5440 7352,5544 7352,6208 7307.54,6252.46 U8.32@7269.88,6252.46
  Bottom w8: RN4.8@6625,5457 v1(6625,5504)
N_D4: RN5.2 U8.41 | length 727.8
  Top w8: v1(7066.5,5528) 7066.5,5658.5 7168,5760 7168,6059.3 7184,6075.3 U8.41@7269.88,6075.3
  Bottom w8: RN5.2@7066.5,5482 v1(7066.5,5528)
N_D5: RN5.4 U8.42 | length 685.8
  Top w8: v1(7098.5,5528) 7098.5,5666.5 7184,5752 7184,6040 7199.61,6055.61 U8.42@7269.88,6055.61
  Bottom w8: RN5.4@7098.5,5482 v1(7098.5,5528)
N_D6: RN5.6 U8.43 | length 643.2
  Top w8: v1(7130.5,5528) 7130.5,5674.5 7200,5744 7200,6019.93 7216,6035.93 U8.43@7269.88,6035.93
  Bottom w8: RN5.6@7130.5,5482 v1(7130.5,5528)
N_D7: RN5.8 U8.44 | length 600.8
  Top w8: v1(7162.5,5528) 7162.5,5682.5 7216,5736 7216,6000 7232.24,6016.24 U8.44@7269.88,6016.24
  Bottom w8: RN5.8@7162.5,5482 v1(7162.5,5528)
N_R/B0: R50.1 RN8.4 U8.7 | length 898.8
  Top w8: v1(8024.39,6040) 8040,6055.61 U8.7@8067.13,6055.61 8167.61,6055.61 8208,6096 8208,6152 8218.5,6162.5 R50.1@8245,6162.5
  Bottom w8: RN8.4@7936,5482 7936,5608 8024.39,5696.39 v1(8024.39,6040)
N_R/B1: R48.2 U8.6 | length 214.8
  Top w8: U8.6@8067.13,6035.93 8219.93,6035.93 8245,6061 R48.2@8245,6087.5
N_RE: RN8.2 U8.8 | length 698.3
  Top w8: v1(8024,6075.3) U8.8@8067.13,6075.3
  Bottom w8: RN8.2@7904,5482 7904,5608 7992,5696 7992,6064 8003.3,6075.3 v1(8024,6075.3)
N_WE: RN6.8 U8.18 | length 1272.4
  Top w8: v1(7587.5,5528) 7659.5,5600 8032,5600 v1(8056,5624) ; U8.18@8067.13,6272.15 8104,6272.15 v1(8120,6256.15)
  Bottom w8: RN6.8@7587.5,5482 v1(7587.5,5528) ; v1(8056,5624) 8072,5640 8072,6208.15 v1(8120,6256.15)
N_WP: R49.1 RN8.6 U8.19 | length 1107.7
  Top w8: U8.19@8067.13,6291.83 v1(8152,6291.83) 8187.83,6291.83 8208.5,6312.5 R49.1@8245,6312.5
  Bottom w8: RN8.6@7968,5482 7968,5608 8056,5696 8056,6256 8091.83,6291.83 v1(8152,6291.83)
NRST: C16.2 J3.1 R28.2 SW9.1 U5.80 U9.32 | length 8334.4
  Top w8: v1(1624,3984) 1634.38,3994.38 U9.32@1670.76,3994.38 ; SW9.1@2384.84,6967.81 2384.84,7003.84 2400,7019 2661,7019 2675,7005 C16.2@2675,6980 ; J3.1@2912.5,6975 2755,6975 R28.2@2750,6980 C16.2@2675,6980 ; U5.80@3645.37,3414.96 3645.37,3922.63 3536,4032 3536,4408 v1(3512,4432) 3456,4488 3456,4976 3136,5296 2744,5296 2632,5408 2632,6964 2648,6980 C16.2@2675,6980
  Bottom w8: v1(1624,3984) 1624,4264 1606.75,4281.25 1462.75,4281.25 1408,4336 1408,4688 1592,4872 2648,4872 2672,4848 2672,4520 2736,4456 3488,4456 v1(3512,4432)
NTRST: CON2.3 RN3.2 SW8.10 | length 1223.6
  Top w8: SW8.10@3350,7062.5 3444.5,6968 3800,6968 3848,7016 3848,7112 3752,7208 3752,7414.5 CON2.3@3800,7462.5
  Bottom w8: SW8.10@3350,7062.5 3398.5,7014 3440,7014 3454,7000 RN3.2@3454,6969.5
NVD33: CB26.1 CB27.1 CT89.2 R49.2 R50.2 RV1.2 SW17.1 U8.1 U8.12 U8.24 U8.34 U8.37 | length 3996.2
  Top w10: 7212.56,6213.09 7212.56,6165.48 7224,6154.04 U8.37@7269.88,6154.04 ; 7216,6213.09 U8.34@7269.88,6213.09 ; 8016,5937.5 U8.1@8067.13,5937.5 ; v2(8016,6154.04) U8.12@8067.13,6154.04 ; U8.24@8067.13,6390.26 8067.13,6408
  Top w40: v2(6952,6037.5) SW17.1@7050,6037.5 ; v2(6964,6192) v2(6992,6220) CT89.2@7050,6220 ; RV1.2@7050,6167.5 CT89.2@7050,6220 ; 7216,6213.09 7212.56,6213.09 7131.91,6213.09 CB27.1@7125,6220 CT89.2@7050,6220 ; v2(7440,5815.5) v2(7480,5815.5) 7885.5,5815.5 v2(7912,5842) 8194,5842 v2(8288,5936) ; 8016,5937.5 7991,5937.5 7968,5960.5 7968,6154.04 ; v2(8016,6154.04) 7968,6154.04 ; 8067.13,6408 7998.26,6408 7968,6377.74 7968,6154.04 ; R50.2@8305,6162.5 v2(8352,6162.5) ; R49.2@8305,6312.5 v2(8352,6312.5)
  Bottom w40: v2(6992,6220) v2(6964,6192) 6952,6180 v2(6952,6037.5) 6952,5928 7064.5,5815.5 v2(7440,5815.5) v2(7480,5815.5) ; v2(7912,5842) 7942,5872 7942,6080 7966,6104 CB26.1@7966,6152 7968.04,6154.04 v2(8016,6154.04) ; v2(8288,5936) 8352,6000 v2(8352,6162.5) v2(8352,6312.5)
PA0: CON3.3 RL1.1 SW6.1 U5.34 | length 6357.1
  Top w8: U5.34@3952.46,2871.65 3984.35,2871.65 3992,2864 3992,2704 4600,2096 CON3.3@4600,2000 ; SW6.1@6825,3425 7275,2975 RL1.1@7970,2975
  Bottom w8: CON3.3@4600,2000 4648,1952 4648,1888 4680,1856 6784,1856 6825,1897 SW6.1@6825,3425
PA1: CON3.4 RL2.1 SW6.2 U5.33 | length 6342.1
  Top w8: U5.33@3952.46,2855.91 3968.09,2855.91 3976,2848 3976,2696 4552,2120 4552,1948 CON3.4@4600,1900 ; SW6.2@6925,3425 7300,3050 RL2.1@7970,3050
  Bottom w8: CON3.4@4600,1900 4660,1840 6880,1840 6925,1885 SW6.2@6925,3425
PA2: CON3.5 RL3.1 SW6.3 U5.32 | length 6315.8
  Top w8: U5.32@3881.59,2785.04 3881.59,2766.41 4500,2148 CON3.5@4500,2000 ; SW6.3@7025,3425 7325,3125 RL3.1@7970,3125
  Bottom w8: CON3.5@4500,2000 4552,1948 4552,1888 4616,1824 6976,1824 7025,1873 SW6.3@7025,3425
PA3: CON3.6 RL4.1 SW6.4 U5.31 | length 6335
  Top w8: U5.31@3865.85,2785.04 3865.85,2758.15 4456,2168 4456,1944 CON3.6@4500,1900 ; SW6.4@7125,3425 7350,3200 RL4.1@7970,3200
  Bottom w8: CON3.6@4500,1900 4592,1808 7072,1808 7125,1861 SW6.4@7125,3425
PA4: CON3.7 RL5.1 SW6.5 SW11.1 U5.30 | length 9960.8
  Top w8: SW11.1@2600,1650 2712,1650 3170,1192 4792,1192 4856,1256 4856,1728 4808,1776 4488,1776 4440,1824 4440,1960 CON3.7@4400,2000 4400,2202.1 3850.1,2752 U5.30@3850.1,2785.04 ; SW6.5@7225,3425 7375,3275 RL5.1@7970,3275
  Bottom w8: CON3.7@4400,2000 4448,1952 4448,1888 4544,1792 7168,1792 7225,1849 SW6.5@7225,3425
PA5: CON3.8 RL6.1 SW6.6 SW11.2 U5.29 | length 10013.2
  Top w8: SW11.2@2500,1650 2546,1696 2688,1696 3176,1208 4784,1208 4840,1264 4840,1720 4800,1760 4480,1760 4400,1840 CON3.8@4400,1900 4360,1940 4360,2216 3834.35,2741.65 U5.29@3834.35,2785.04 ; SW6.6@7325,3425 7446,3304 7856,3304 7902,3350 RL6.1@7970,3350
  Bottom w8: CON3.8@4400,1900 4524,1776 7264,1776 7325,1837 SW6.6@7325,3425
PA6: CON3.9 RL7.1 SW6.7 SW11.3 U5.28 | length 10272.4
  Top w8: SW11.3@2400,1650 2462,1712 2696,1712 3184,1224 4776,1224 4824,1272 4824,1712 4792,1744 4440,1744 4344,1840 4344,1956 CON3.9@4300,2000 4300,2252 3818.6,2733.4 U5.28@3818.6,2785.04 ; SW6.7@7425,3425 7522,3328 7832,3328 7929,3425 RL7.1@7970,3425
  Bottom w8: CON3.9@4300,2000 4352,1948 4352,1880 4472,1760 7272,1760 7425,1913 SW6.7@7425,3425
PA7: CON3.10 RL8.1 SW6.8 U5.27 | length 6504
  Top w8: U5.27@3802.85,2785.04 3802.85,2725.15 4256,2272 4256,1944 CON3.10@4300,1900 ; SW6.8@7525,3425 7590,3352 7816,3352 7856,3392 7856,3472 7884,3500 RL8.1@7970,3500
  Bottom w8: CON3.10@4300,1900 4456,1744 7280,1744 7525,1989 SW6.8@7525,3425
PA8: CON3.11 RL9.1 SW6.9 SW11.4 U5.26 | length 10552.1
  Top w8: SW11.4@2300,1650 2378,1728 2704,1728 3192,1240 4768,1240 4808,1280 4808,1704 4784,1728 4344,1728 4240,1832 4240,1960 CON3.11@4200,2000 4200,2304 3787.11,2716.89 U5.26@3787.11,2785.04 ; SW6.9@7625,3425 7674,3376 7800,3376 7832,3408 7832,3552 7855,3575 RL9.1@7970,3575
  Bottom w8: CON3.11@4200,2000 4248,1952 4248,1888 4408,1728 7289,1728 7625,2064 SW6.9@7625,3425
PA9: CON3.12 RL10.1 SW6.10 SW11.5 U5.25 | length 10536.8
  Top w8: SW11.5@2200,1650 2294,1744 2712,1744 3200,1256 4760,1256 4792,1288 4792,1696 4776,1712 4336,1712 4200,1848 CON3.12@4200,1900 4152,1948 4152,2328 3771.36,2708.64 U5.25@3771.36,2785.04 ; SW6.10@7725,3425 7725,3613 7762,3650 RL10.1@7970,3650
  Bottom w8: CON3.12@4200,1900 4388,1712 7296,1712 7725,2141 SW6.10@7725,3425
PA10: CON3.13 RL11.1 U5.23 | length 6815.3
  Top w8: U5.23@3739.86,2785.04 3739.86,2516.14 4100,2156 CON3.13@4100,2000 ; v1(7936,3725) RL11.1@7970,3725
  Bottom w8: CON3.13@4100,2000 4144,1956 4144,1728 4176,1696 7304,1696 8048,2440 8048,3613 v1(7936,3725)
PA11: CON3.14 RL12.1 U5.22 | length 7064.5
  Top w8: U5.22@3724.11,2785.04 3724.11,2507.89 4056,2176 4056,1944 CON3.14@4100,1900 ; v1(7936,3800) RL12.1@7970,3800
  Bottom w8: CON3.14@4100,1900 4100,1668 4168,1600 7232,1600 8064,2432 8064,3672 v1(7936,3800)
PA12: CON3.15 RL13.1 SW10.1 U5.21 | length 8012
  Top w8: U5.21@3708.37,2785.04 3708.37,2499.63 4000,2208 CON3.15@4000,2000 4040,1960 4040,1376 4066,1350 SW10.1@4200,1350 ; v1(7936,3875) RL13.1@7970,3875
  Bottom w8: CON3.15@4000,2000 4048,1952 4048,1696 4160,1584 7240,1584 8080,2424 8080,3731 v1(7936,3875)
PA13: CON3.16 RL14.1 SW10.2 U5.20 | length 8200.4
  Top w8: U5.20@3692.62,2785.04 3692.62,2491.38 3960,2224 3960,1940 CON3.16@4000,1900 4000,1392 4088,1304 4254,1304 SW10.2@4300,1350 ; v1(7936,3950) RL14.1@7970,3950
  Bottom w8: CON3.16@4000,1900 4000,1720 4152,1568 7248,1568 8096,2416 8096,3790 v1(7936,3950)
PA14: CON3.17 RL15.1 SW10.3 U5.19 | length 8605.2
  Top w8: U5.19@3676.87,2785.04 3676.87,2483.13 3900,2260 CON3.17@3900,2000 3944,1956 3944,1424 4080,1288 4338,1288 SW10.3@4400,1350 ; v1(7936,4025) RL15.1@7970,4025
  Bottom w8: CON3.17@3900,2000 3952,1948 3952,1744 4144,1552 7256,1552 8112,2408 8112,3849 v1(7936,4025)
PA15: CON3.18 RL16.1 SW10.4 U5.18 | length 8768.7
  Top w8: U5.18@3661.12,2785.04 3661.12,2474.88 3848,2288 3848,1952 CON3.18@3900,1900 3900,1444 4072,1272 4422,1272 SW10.4@4500,1350 ; v1(7936,4100) RL16.1@7970,4100
  Bottom w8: CON3.18@3900,1900 3900,1772 4136,1536 7264,1536 8128,2400 8128,3908 v1(7936,4100)
PB0: CON9.3 RS14.1 U5.58 | length 4245.7
  Top w8: U5.58@3952.46,3249.61 4025.61,3249.61 4224,3448 4224,4104 4320,4200 4856,4200 4952,4296 4952,4648 CON9.3@4900,4700 ; v1(4272,3362.5) RS14.1@4307.5,3362.5
  Bottom w8: v1(4272,3362.5) 4216,3418.5 4216,4384 4272,4440 4824,4440 4848,4464 4848,4648 CON9.3@4900,4700
PB1: CON9.4 RS16.1 U5.59 | length 4442.8
  Top w8: U5.59@3952.46,3265.35 4017.35,3265.35 4208,3456 4208,4112 4312,4216 4848,4216 4900,4268 CON9.4@4900,4600 ; v1(4272,3400) 4751.5,3400 4767.5,3384 RS16.1@4767.5,3362.5
  Bottom w8: v1(4272,3400) 4232,3440 4232,4376 4280,4424 4872,4424 4900,4452 CON9.4@4900,4600
PB2: CON9.5 RL17.1 SW10.5 SW27.4 U5.60 | length 11460.1
  Top w8: U5.60@3952.46,3281.1 4009.1,3281.1 4192,3464 4192,4120 4376,4304 4776,4304 4848,4376 4848,4652 CON9.5@4800,4700 4800,4752 4808,4760 5280,4760 5328,4712 5328,1272 SW27.4@5675,925 ; v1(5376,4880) 5556,4700 RL17.1@7970,4700
  Bottom w8: SW10.5@4600,1350 4646,1304 5608,1304 5675,1237 SW27.4@5675,925 ; CON9.5@4800,4700 4800,4864 4816,4880 v1(5376,4880)
PB3: CON9.6 RL18.1 SW10.6 SW27.3 U5.61 | length 11656.3
  Top w8: U5.61@3952.46,3296.85 4000.85,3296.85 4176,3472 4176,4128 4368,4320 4768,4320 4800,4352 CON9.6@4800,4600 4760,4640 4760,4752 4784,4776 5288,4776 5344,4720 5344,1356 SW27.3@5775,925 ; v1(5416,4904) 5544,4775 RL18.1@7970,4775
  Bottom w8: SW10.6@4700,1350 5594,1350 5775,1169 SW27.3@5775,925 ; CON9.6@4800,4600 4752,4648 4752,4888 4768,4904 v1(5416,4904)
PB4: CON9.7 SW27.2 U5.62 | length 6718.2
  Top w8: U5.62@3952.46,3312.6 3992.6,3312.6 4160,3480 4160,4136 4440,4416 4704,4416 4744,4456 4744,4656 CON9.7@4700,4700 4700,4748 4744,4792 5296,4792 5360,4728 5360,1376 5656,1080 5720,1080 SW27.2@5875,925
PB5: CON9.8 SW27.1 U5.63 | length 6820.2
  Top w8: U5.63@3952.46,3328.35 3984.35,3328.35 4144,3488 4144,4144 4432,4432 4672,4432 4700,4460 CON9.8@4700,4600 4656,4644 4656,4752 4712,4808 5304,4808 5376,4736 5376,1392 5672,1096 5804,1096 SW27.1@5975,925
PB6: CON9.9 SW12.1 U5.65 | length 6488.6
  Top w8: U5.65@3881.59,3414.96 3881.59,3433.59 4128,3680 4128,4152 4424,4448 4608,4448 4640,4480 4640,4660 CON9.9@4600,4700
  Bottom w8: CON9.9@4600,4700 4600,4896 4624,4920 5264,4920 5904,5560 7440,5560 7600,5720 7600,6159 8116,6675 SW12.1@8175,6675
PB7: CON9.10 SW12.2 U5.66 | length 6663
  Top w8: U5.66@3865.85,3414.96 3865.85,3441.85 4112,3688 4112,4160 4416,4464 4576,4464 4600,4488 CON9.10@4600,4600
  Bottom w8: CON9.10@4600,4600 4552,4648 4552,4912 4576,4936 5256,4936 5896,5576 7432,5576 7584,5728 7584,6168 8136,6720 8230,6720 SW12.2@8275,6675
PB8: CON9.11 SW12.3 U5.67 | length 6800.2
  Top w8: U5.67@3850.1,3414.96 3850.1,3450.1 4096,3696 4096,4168 4408,4480 4528,4480 4552,4504 4552,4648 CON9.11@4500,4700
  Bottom w8: CON9.11@4500,4700 4500,4924 4528,4952 5248,4952 5888,5592 7424,5592 7568,5736 7568,6176 8128,6736 8314,6736 SW12.3@8375,6675
PB9: CON9.12 SW12.4 U5.68 | length 6896.5
  Top w8: U5.68@3834.35,3414.96 3834.35,3458.35 4080,3704 4080,4180 CON9.12@4500,4600
  Bottom w8: CON9.12@4500,4600 4448,4652 4448,4952 4464,4968 5240,4968 5880,5608 7416,5608 7552,5744 7552,6184 8120,6752 8398,6752 SW12.4@8475,6675
PB10: CON9.13 SW12.5 U5.69 | length 7045.8
  Top w8: U5.69@3818.6,3414.96 3818.6,3466.6 4064,3712 4064,4192 4448,4576 4448,4652 CON9.13@4400,4700
  Bottom w8: CON9.13@4400,4700 4400,4960 4424,4984 5232,4984 5872,5624 7408,5624 7536,5752 7536,6192 8112,6768 8482,6768 SW12.5@8575,6675
PB11: CON9.14 SW12.6 U5.70 | length 7203.1
  Top w8: U5.70@3802.85,3414.96 3802.85,3474.85 4048,3720 4048,4248 CON9.14@4400,4600
  Bottom w8: CON9.14@4400,4600 4352,4648 4352,4976 4376,5000 5224,5000 5864,5640 7400,5640 7520,5760 7520,6200 8104,6784 8566,6784 SW12.6@8675,6675
PB12: CON9.15 SW28.4 U5.71 | length 8068.9
  Top w8: U5.71@3787.11,3414.96 3787.11,3483.11 4032,3728 4032,4272 4352,4592 4352,4648 CON9.15@4300,4700 4300,4756 4368,4824 5312,4824 5392,4744 5392,1408 5680,1120 6980,1120 SW28.4@7175,925
PB13: CON9.16 SW28.3 U5.72 | length 8200.8
  Top w8: U5.72@3771.36,3414.96 3771.36,3491.36 4016,3736 4016,4316 CON9.16@4300,4600 4256,4644 4256,4752 4344,4840 5320,4840 5408,4752 5408,1424 5696,1136 7064,1136 SW28.3@7275,925
PB14: CON9.17 SW28.2 U5.73 | length 8345.4
  Top w8: U5.73@3755.61,3414.96 3755.61,3499.61 4000,3744 4000,4336 4240,4576 4240,4660 CON9.17@4200,4700 4200,4752 4304,4856 5328,4856 5424,4760 5424,1440 5712,1152 7148,1152 SW28.2@7375,925
PB15: CON9.18 SW28.1 U5.74 | length 8495.2
  Top w8: U5.74@3739.86,3414.96 3739.86,3507.86 3984,3752 3984,4384 CON9.18@4200,4600 4152,4648 4152,4752 4272,4872 5336,4872 5440,4768 5440,1456 5728,1168 7232,1168 SW28.1@7475,925
PD0: CON16.3 SW14.1 U5.86 | length 5129
  Top w8: CON16.3@3200,4700 3240,4660 3240,3640 3288,3592 3454.89,3592 3550.89,3496 U5.86@3550.89,3414.96
  Bottom w8: CON16.3@3200,4700 3200,4864 3248,4912 4088,4912 4160,4984 4160,5480 4200,5520 5712,5520 5892,5700 SW14.1@6000,5700
PD1: CON16.4 SW14.2 U5.87 | length 5326.9
  Top w8: CON16.4@3200,4600 3200,3656 3280,3576 3447.14,3576 3535.14,3488 U5.87@3535.14,3414.96
  Bottom w8: CON16.4@3200,4600 3152,4648 3152,4864 3216,4928 4080,4928 4144,4992 4144,5488 4192,5536 5704,5536 5912,5744 6056,5744 SW14.2@6100,5700
PD2: CON16.5 SW14.3 U5.88 | length 5507.3
  Top w8: CON16.5@3100,4700 3152,4648 3152,3680 3272,3560 3439.39,3560 3519.39,3480 U5.88@3519.39,3414.96
  Bottom w8: CON16.5@3100,4700 3100,4864 3180,4944 4072,4944 4128,5000 4128,5496 4184,5552 5696,5552 5904,5760 6140,5760 SW14.3@6200,5700
PD3: CON16.6 SW14.4 U5.89 | length 5692.5
  Top w8: CON16.6@3100,4600 3100,3708 3264,3544 3431.76,3544 3503.64,3472 U5.89@3503.64,3414.96
  Bottom w8: CON16.6@3100,4600 3048,4652 3048,4872 3136,4960 4064,4960 4112,5008 4112,5504 4176,5568 5688,5568 5896,5776 6224,5776 SW14.4@6300,5700
PD4: CON16.7 SW14.5 U5.90 | length 5871.9
  Top w8: CON16.7@3000,4700 3048,4652 3048,3736 3256.05,3527.95 3423.95,3527.95 3487.89,3464 U5.90@3487.89,3414.96
  Bottom w8: CON16.7@3000,4700 3000,4880 3096,4976 4056,4976 4096,5016 4096,5512 4168,5584 5680,5584 5888,5792 6308,5792 SW14.5@6400,5700
PD5: CON16.8 SW14.6 U5.91 | length 6060.7
  Top w8: CON16.8@3000,4600 3000,3760 3247.89,3512.11 3416.04,3512.11 3472.15,3456 U5.91@3472.15,3414.96
  Bottom w8: CON16.8@3000,4600 2952,4648 2952,4904 3040,4992 4048,4992 4080,5024 4080,5520 4160,5600 5672,5600 5880,5808 6392,5808 SW14.6@6500,5700
PD6: CON16.9 SW14.7 U5.92 | length 6142.6
  Top w8: CON16.9@2900,4700 2952,4648 2952,3784.2 3239.9,3496.3 3408.1,3496.3 3456.4,3448 U5.92@3456.4,3414.96
  Bottom w8: CON16.9@2900,4700 2900,4920 2988,5008 3768,5008 3848,5088 3848,5400 4064,5616 5664,5616 5872,5824 6476,5824 SW14.7@6600,5700
PD7: CON16.10 SW14.8 U5.93 | length 6323.1
  Top w8: CON16.10@2900,4600 2900,3812 3231.68,3480.32 3400.32,3480.32 3440.65,3440 U5.93@3440.65,3414.96
  Bottom w8: CON16.10@2900,4600 2848,4652 2848,4920 2952,5024 3760,5024 3832,5096 3832,5408 4056,5632 5656,5632 5864,5840 6560,5840 SW14.8@6700,5700
PE0: CON4.3 SW25.2 U5.97 | length 6742.8
  Top w8: CON4.3@2500,4700 2448,4648 2448,3856 2792,3512 3072,3512 3136,3448 3184.09,3448 3288,3344.09 U5.97@3322.54,3344.09
  Bottom w8: CON4.3@2500,4700 2448,4648 2448,4136 2704,3880 2704,1856 2760,1800 3262.5,1800 SW25.2@4137.5,925
PE1: CON4.4 SW25.1 U5.96 | length 6589.4
  Top w8: CON4.4@2500,4600 2500,3828 2800,3528 3080,3528 3144,3464 3385.41,3464 3393.41,3456 U5.96@3393.41,3414.96
  Bottom w8: CON4.4@2500,4600 2500,4108 2720,3888 2720,1872 2776,1816 3280,1816 3656,1440 3722.5,1440 SW25.1@4237.5,925
PF0: CON10.3 SW18.1 U5.111 | length 2087.3
  Top w8: CON10.3@2400,3200 2616,3200 2712,3104 3200,3104 3219.62,3123.62 U5.111@3322.54,3123.62
  Bottom w8: SW18.1@1600,3000 1600,3000.57 1600.57,3000.57 1697.14,2904 2050.43,2904 2120,2973.57 2120,3168 2152,3200 2232,3200 2280,3152 2352,3152 CON10.3@2400,3200
PF1: CON10.4 SW18.2 U5.110 | length 1997.4
  Top w8: CON10.4@2300,3200 2348,3248 2592,3248 2720,3120 3192,3120 3211.37,3139.37 U5.110@3322.54,3139.37
  Bottom w8: SW18.2@1700,3000 1780,2920 2045.21,2920 2104,2978.79 2104,3192 2136,3224 2276,3224 CON10.4@2300,3200